# Altium PCB PCB1.PcbDoc
Units mil, origin at the board's own origin, x right, y up, seen from the top; angles counter-clockwise.
Board outline 5000 x 4000 mil, 4 copper layers (Top Layer, Internal Plane 1, Internal Plane 2, Bottom Layer); 3 components, 0 nets, 9 pads, 0 vias.
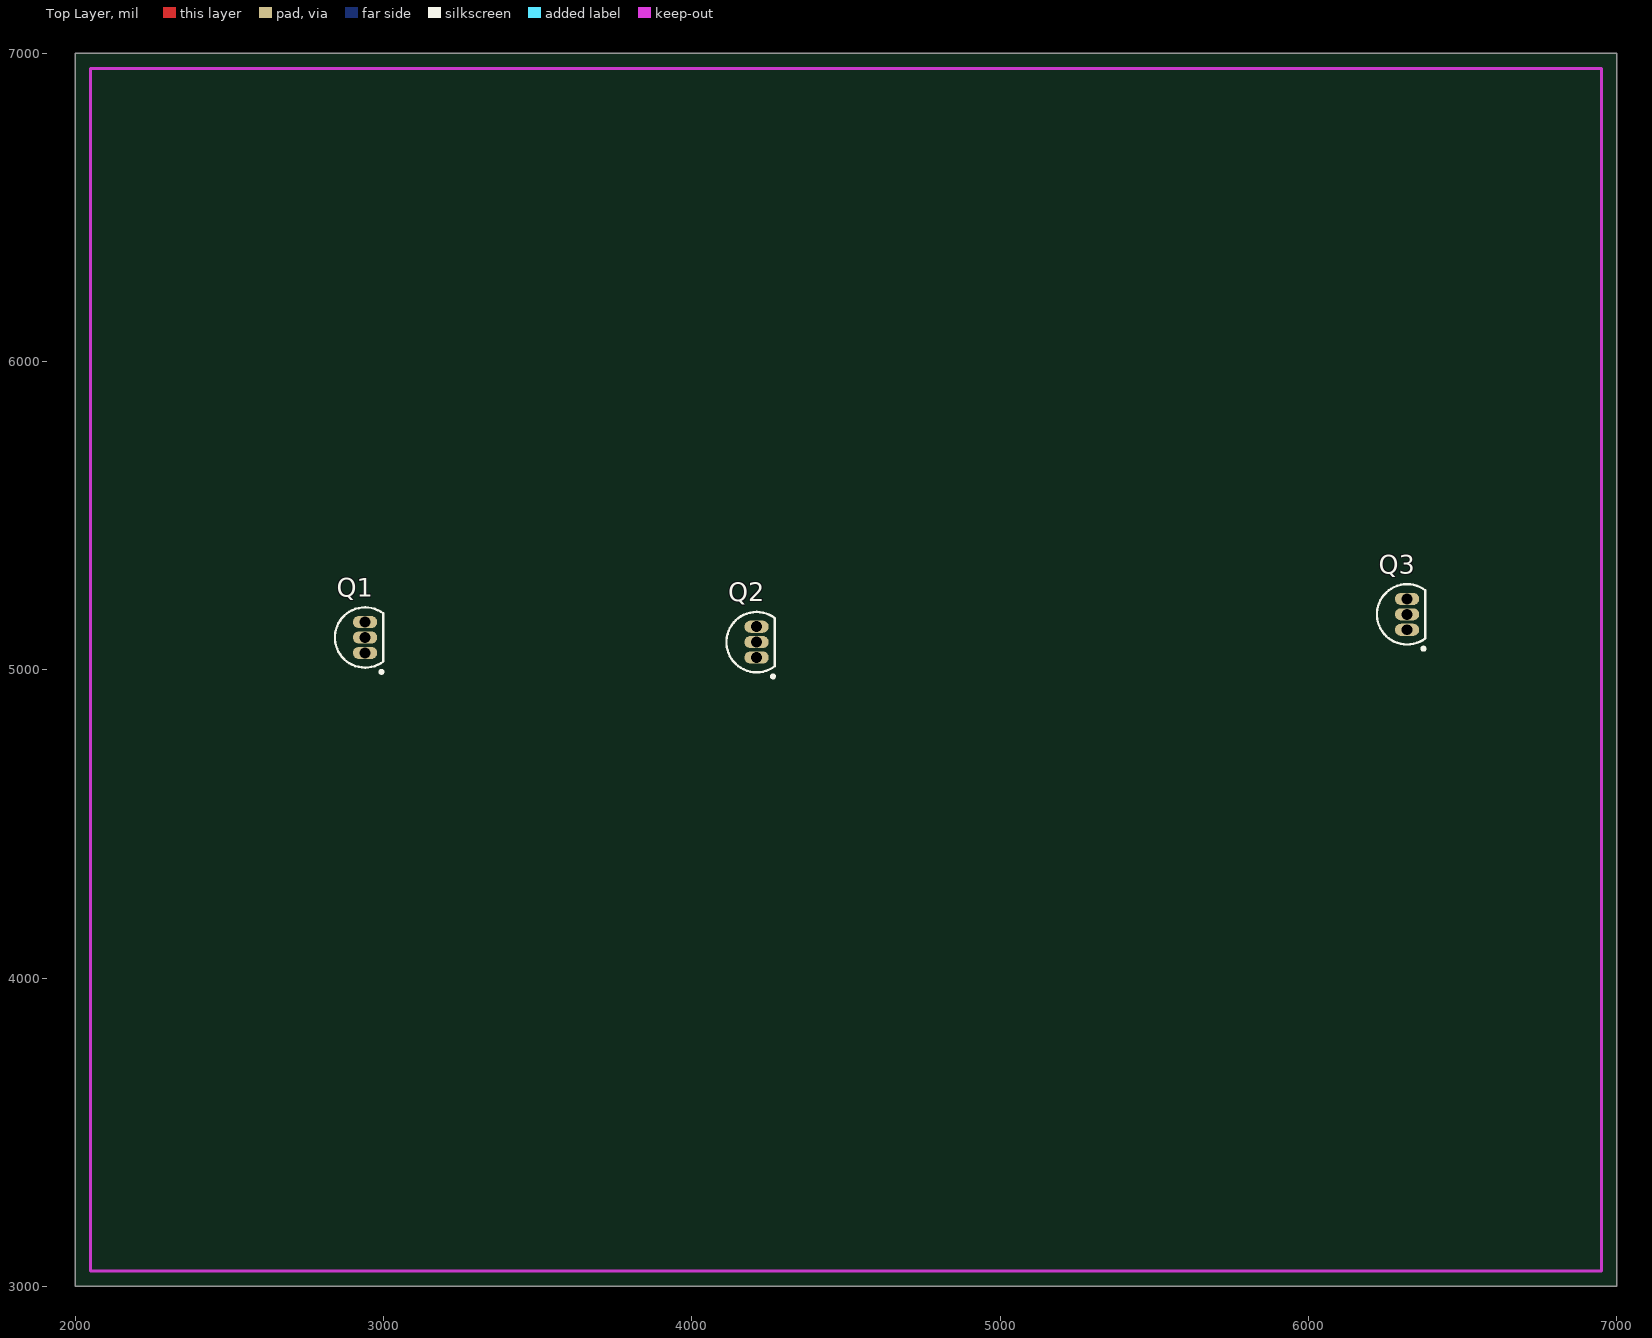
[diagram p0: Top Layer view]
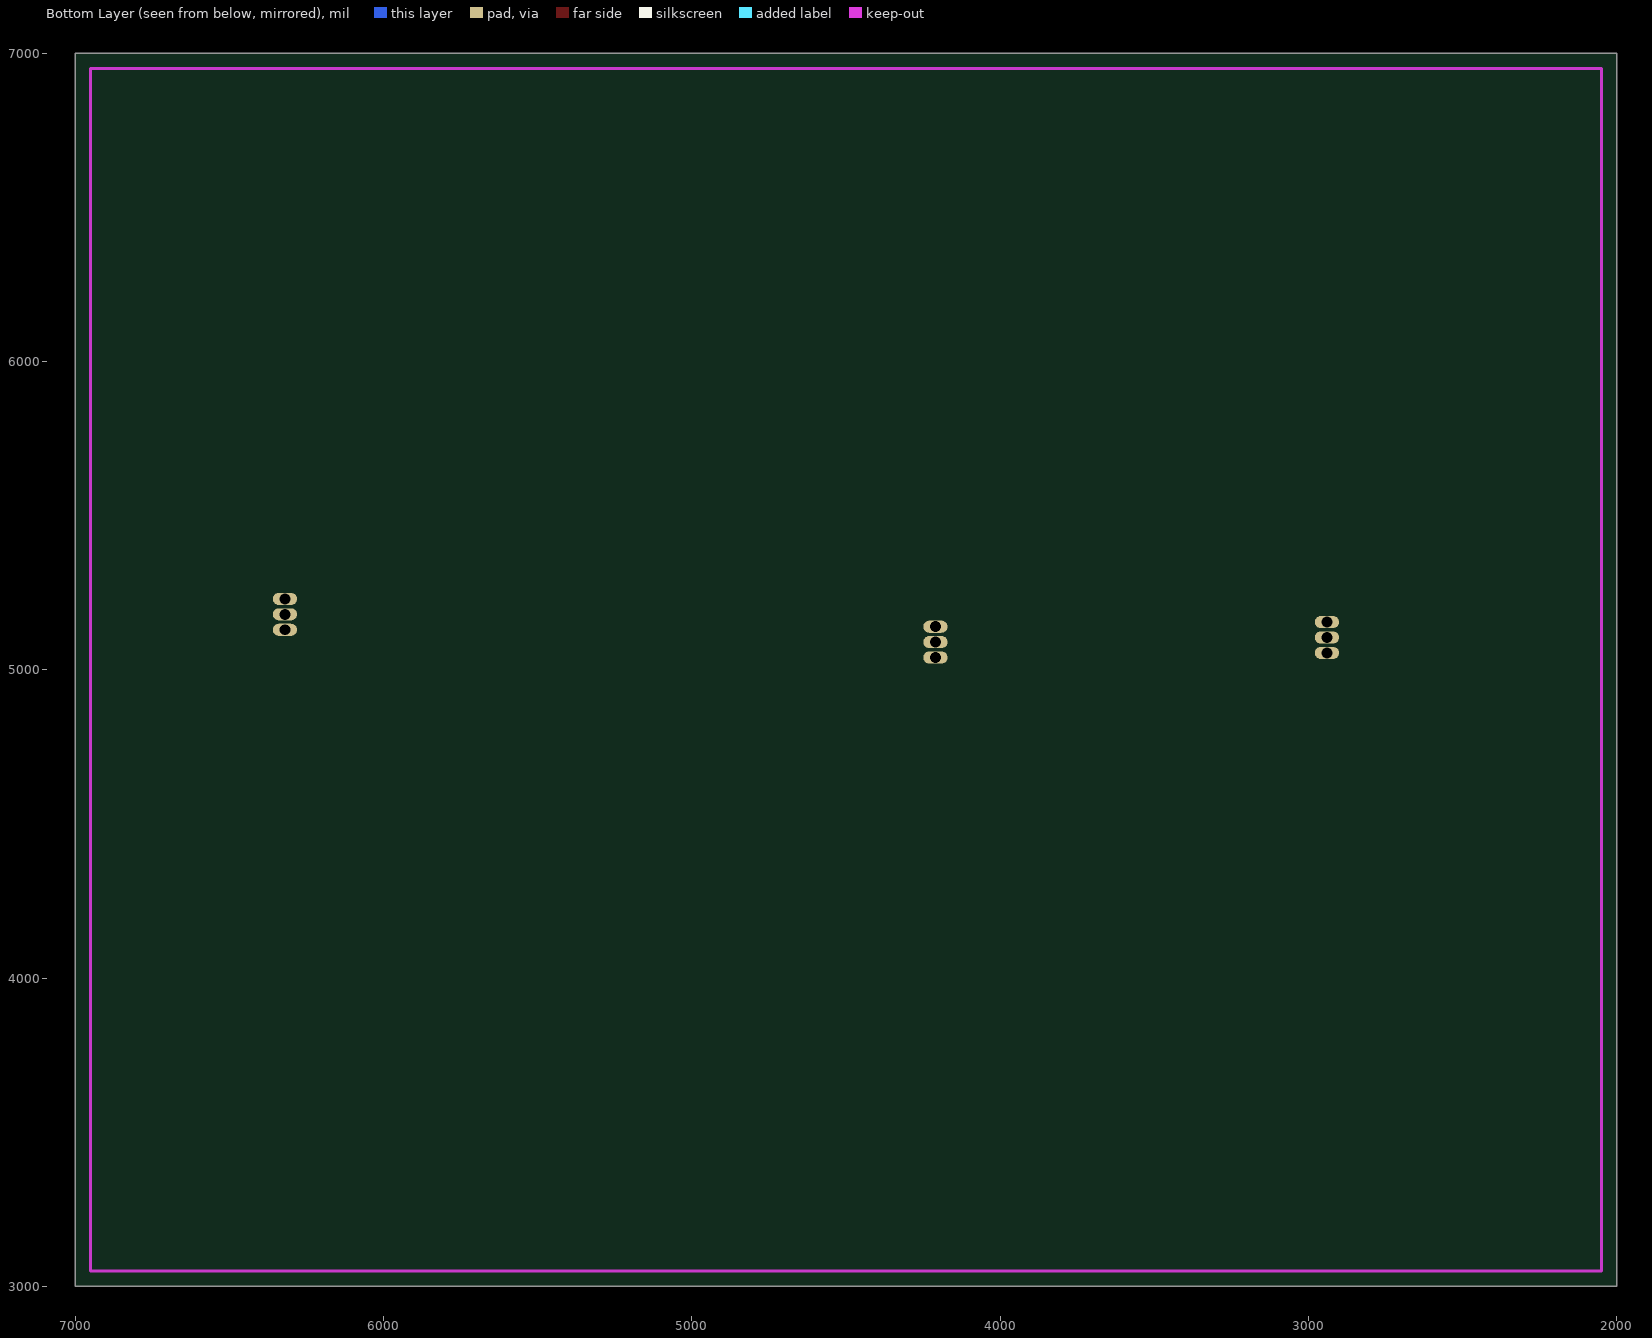
[diagram p1: Bottom Layer view, seen from below]
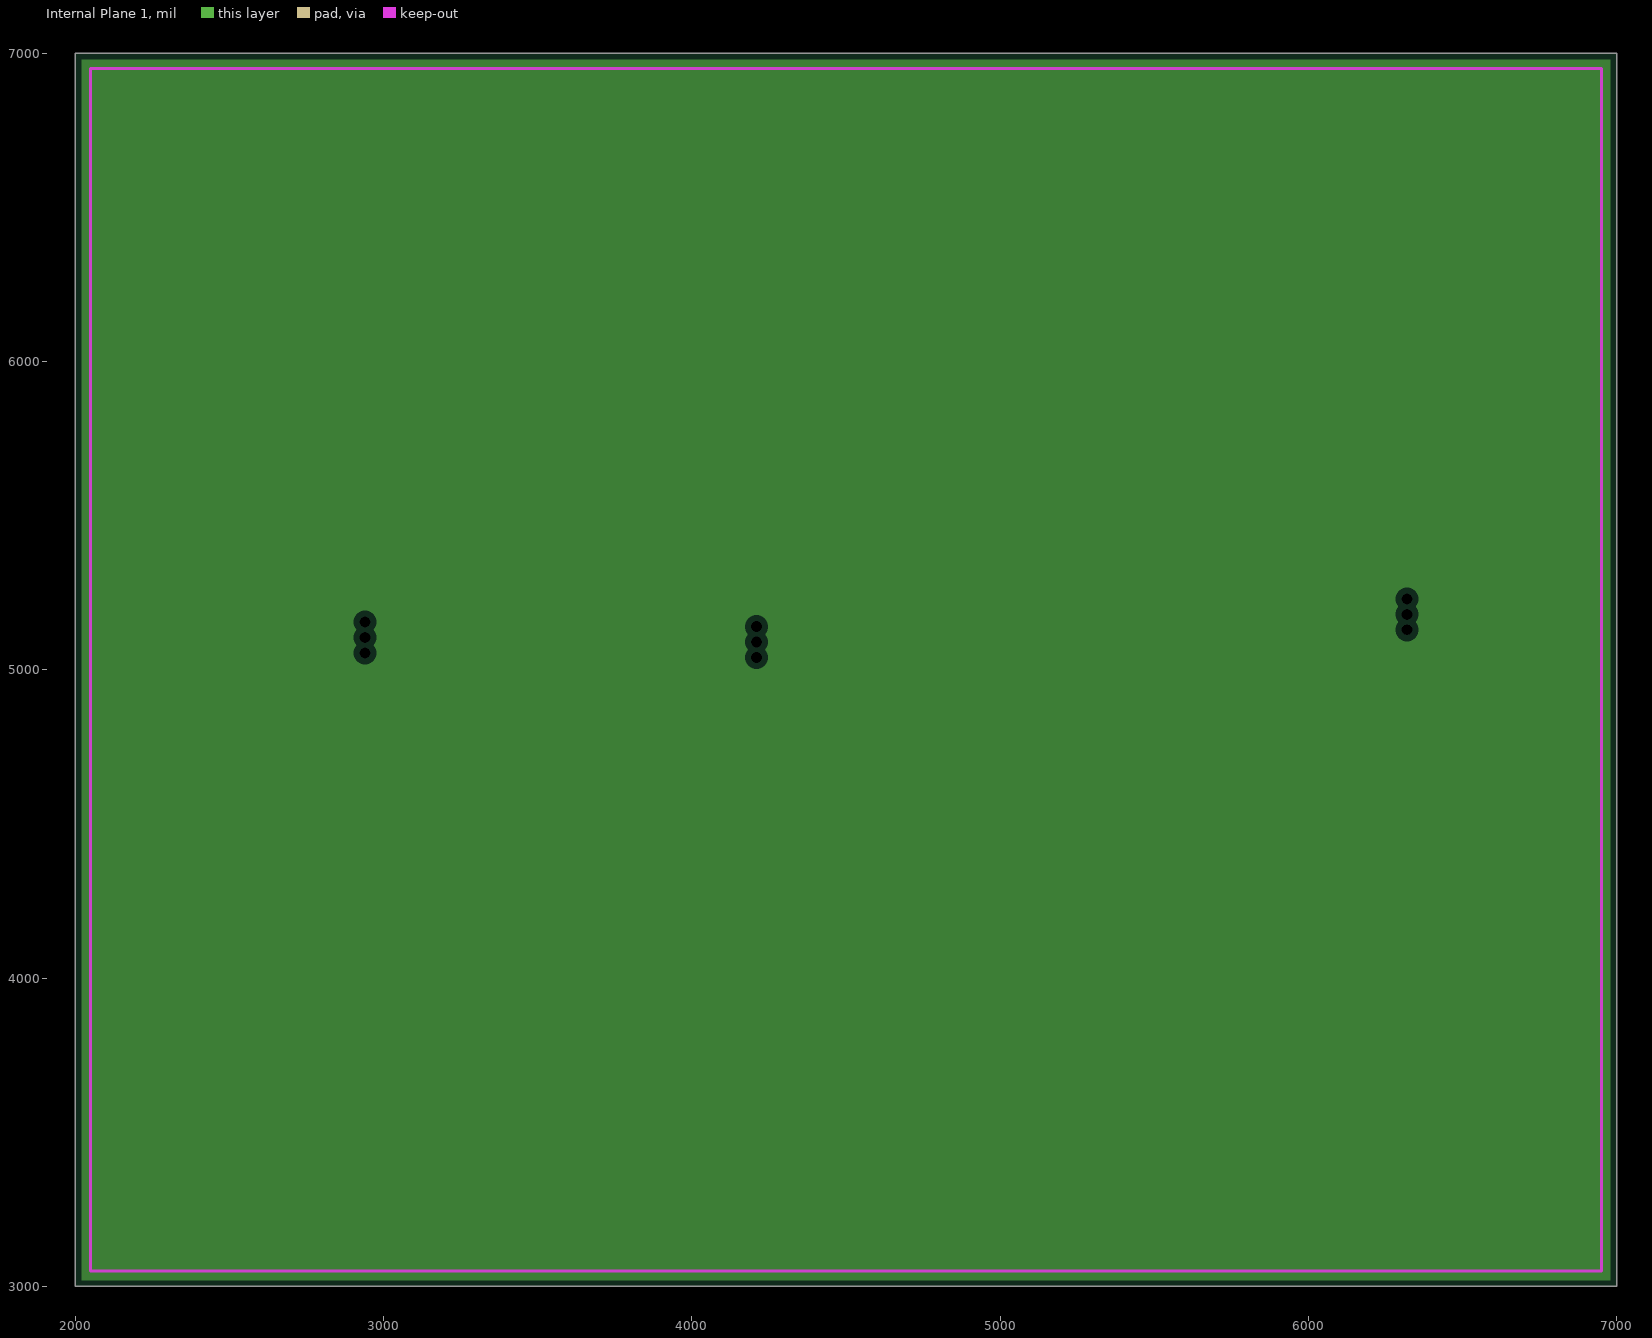
[diagram p2: Internal Plane 1, clearances drawn from the general rule]
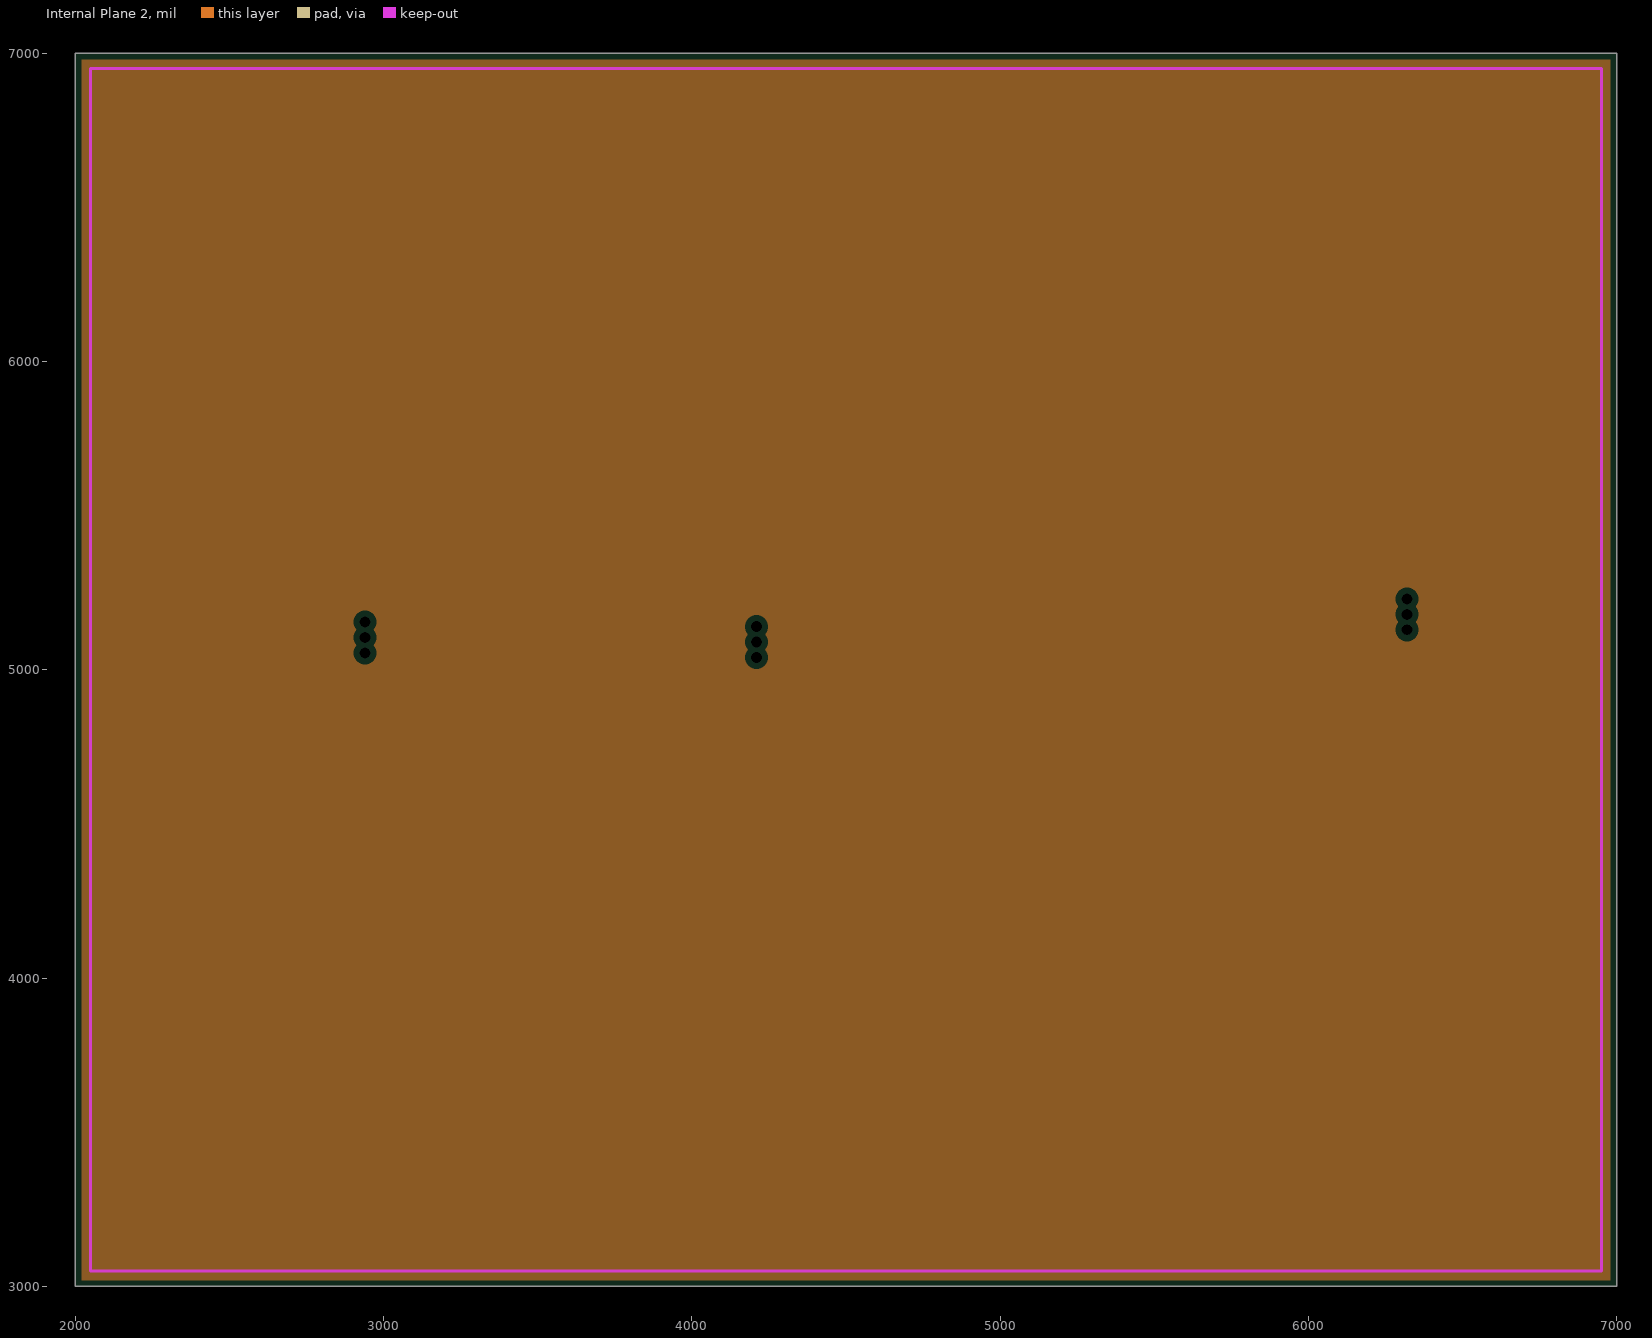
[diagram p3: Internal Plane 2, clearances drawn from the general rule]

## Layer stack, top to bottom
Top Layer: signal copper 1.4
Dielectric: dielectric 12.6, FR-4, Dk 4.8
Internal Plane 1: plane copper 1.4
Dielectric: dielectric 12.6, FR-4, Dk 4.8
Internal Plane 2: plane copper 1.4
Dielectric: dielectric 12.6, FR-4, Dk 4.8
Bottom Layer: signal copper 1.4

## Board outline
2000,3000 7000,3000 7000,7000 2000,7000

## Design rules (kind name [scope] priority, off if disabled: settings)
Clearance [All] p1: gap=8
PlaneClearance [All] p1: clearance=20
PlaneConnect [All] p1: planeconnectstyle=Relief reliefexpansion=20 reliefentries=4 reliefconductorwidth=10 reliefairgap=10
PolygonConnect [All] p1: connectstyle=Relief reliefconductorwidth=10 reliefentries=4 polygonreliefangle="90 Angle" airgapwidth=10
RoutingVias [All] p1: holewidth=25 width=40 viastyle="Through Hole" minholewidth=28 minwidth=50 maxholewidth=28 maxwidth=50
SilkToSolderMaskClearance [All] p1: minsilkscreentomaskgap=10
SolderMaskExpansion [All] p1: expansion=4
Width [All] p1: maxlimit=8 minlimit=8 preferedwidth=8
25 further rules are at their usual default settings.

## Classes and differential pairs
component class Sheet1: Q1 Q3

## Components (designator, comment, footprint, x,y, rotation, side; value= is the part's Value field where it differs from the comment)
Q1 "2N3904" TO-92A 2940,5105 r0 top
Q2 "2N3904" TO-92A 4210,5090 r0 top
Q3 "2N3904" TO-92A 6320,5180 r0 top

## Footprints (in the part's own frame and the unit in brackets; to place one, negate y for a bottom-side part, rotate by r counter-clockwise, add the part's x,y. Pads: shape width x height; smd on the part's side, far side on the other; paste and mask are expansions set on the pad)
TO-92A [mm] "TO, Flat Index; 3 In-Line, Axial Leads; Body Dia. 4.5mm; Leads 0.51 x 0.48 mm (max)"
  oval 2x1 hole 0.9: 1(0,-1.27) 2(0,0) 3(0,1.27)
  silkscreen extent -2.48,-2.95 1.5,2.48, body extent -2.5,-2.5 1.5,2.5, height 6.86

## Part data
Q1 Q2 Q3: "NPN General Purpose Amplifier"

## Nets (pads, with @x,y where several pads share a name; then routed paths per layer and width w, separated by ;. In a path a pad name is that pad's centre, name@x,y a point inside that pad or via, vN(x,y) a via of type N, cw(c..) or ccw(c..) an arc to the next point about the centre after c; other vN are vias at no path point)
pads on no net: Q1.1 Q1.2 Q1.3 Q2.1 Q2.2 Q2.3 Q3.1 Q3.2 Q3.3

## Polygon pours and split planes (outlines as drawn)
no net on Internal Plane 1 (split plane): 6979.9,3020.1 2020.1,3020.1 2020.1,6979.9 6979.9,6979.9
no net on Internal Plane 2 (split plane): 6979.9,3020.1 2020.1,3020.1 2020.1,6979.9 6979.9,6979.9

## Keep-outs
Keep-Out Layer:
  lines w10: 2050,3050 2050,6950 6950,6950 6950,3050 2050,3050

## Silkscreen, mask and mechanical layers (free items; w line width, h text height)
Drill Drawing:
  text "Drill Drawing." at 7200,3100 h60

## Dimensions
2050,3050 to 2050,6950 on Mechanical 1
2050,3050 to 6950,3050 on Mechanical 1